# Altium PCB FEU31_Part1.PcbDoc
Units mm, origin at the board's own origin, x right, y up, seen from the top; angles counter-clockwise.
Board outline 22 x 22 mm, 2 copper layers (Top Layer, Bottom Layer), stack 1.021 mm thick; 41 components, 22 nets, 90 pads, 8 vias.
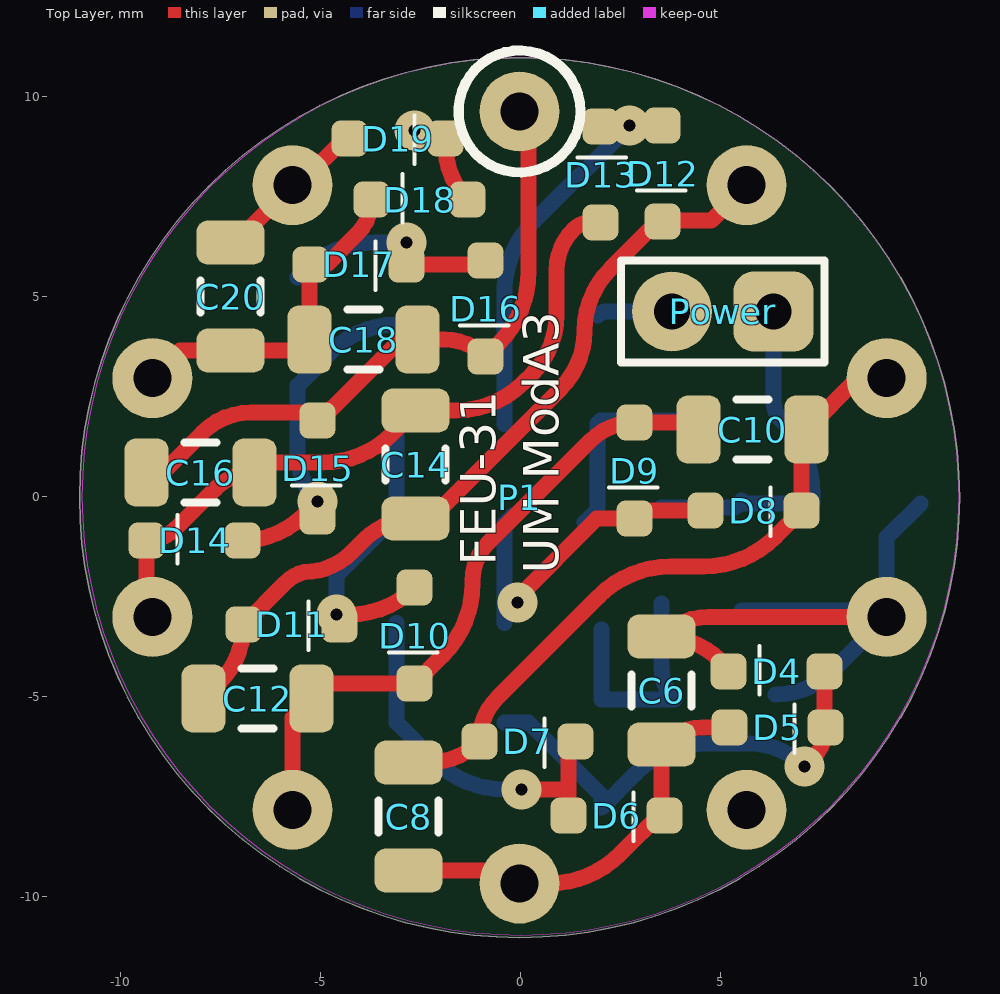
[diagram p0: Top Layer view]
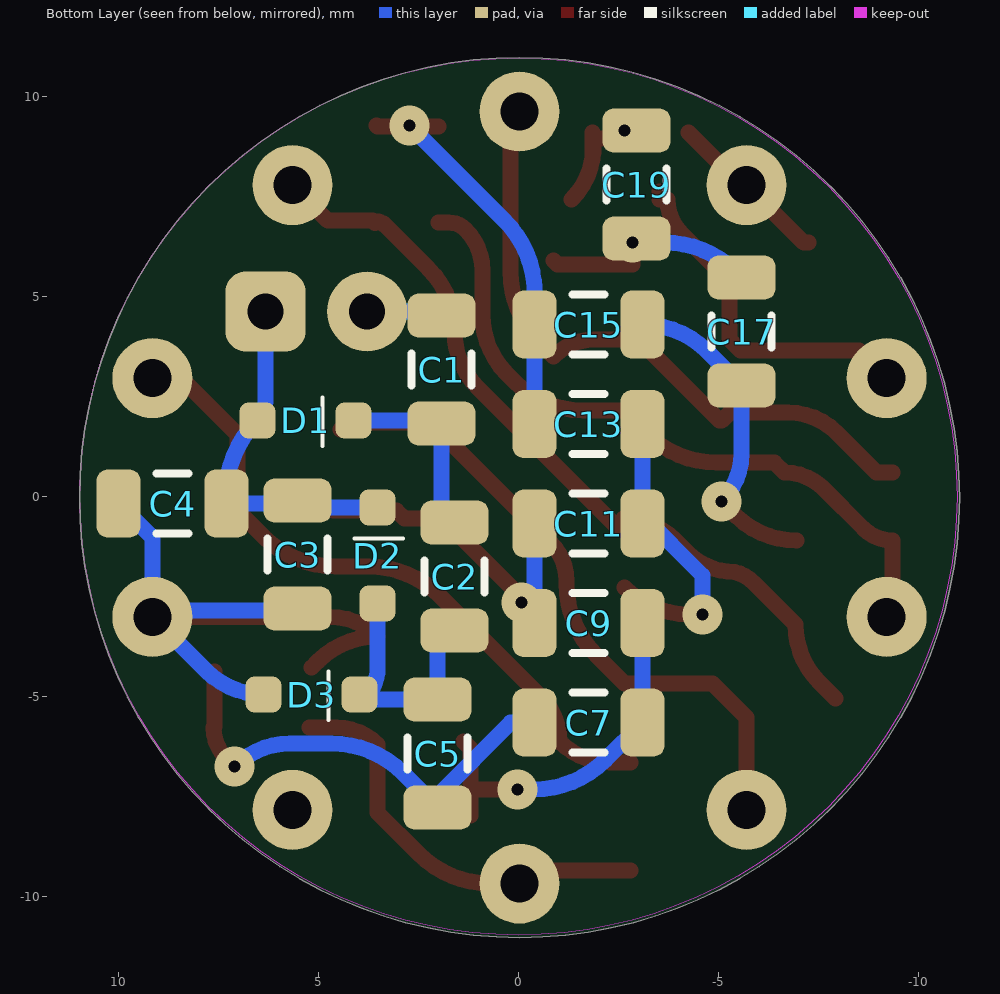
[diagram p1: Bottom Layer view, seen from below]
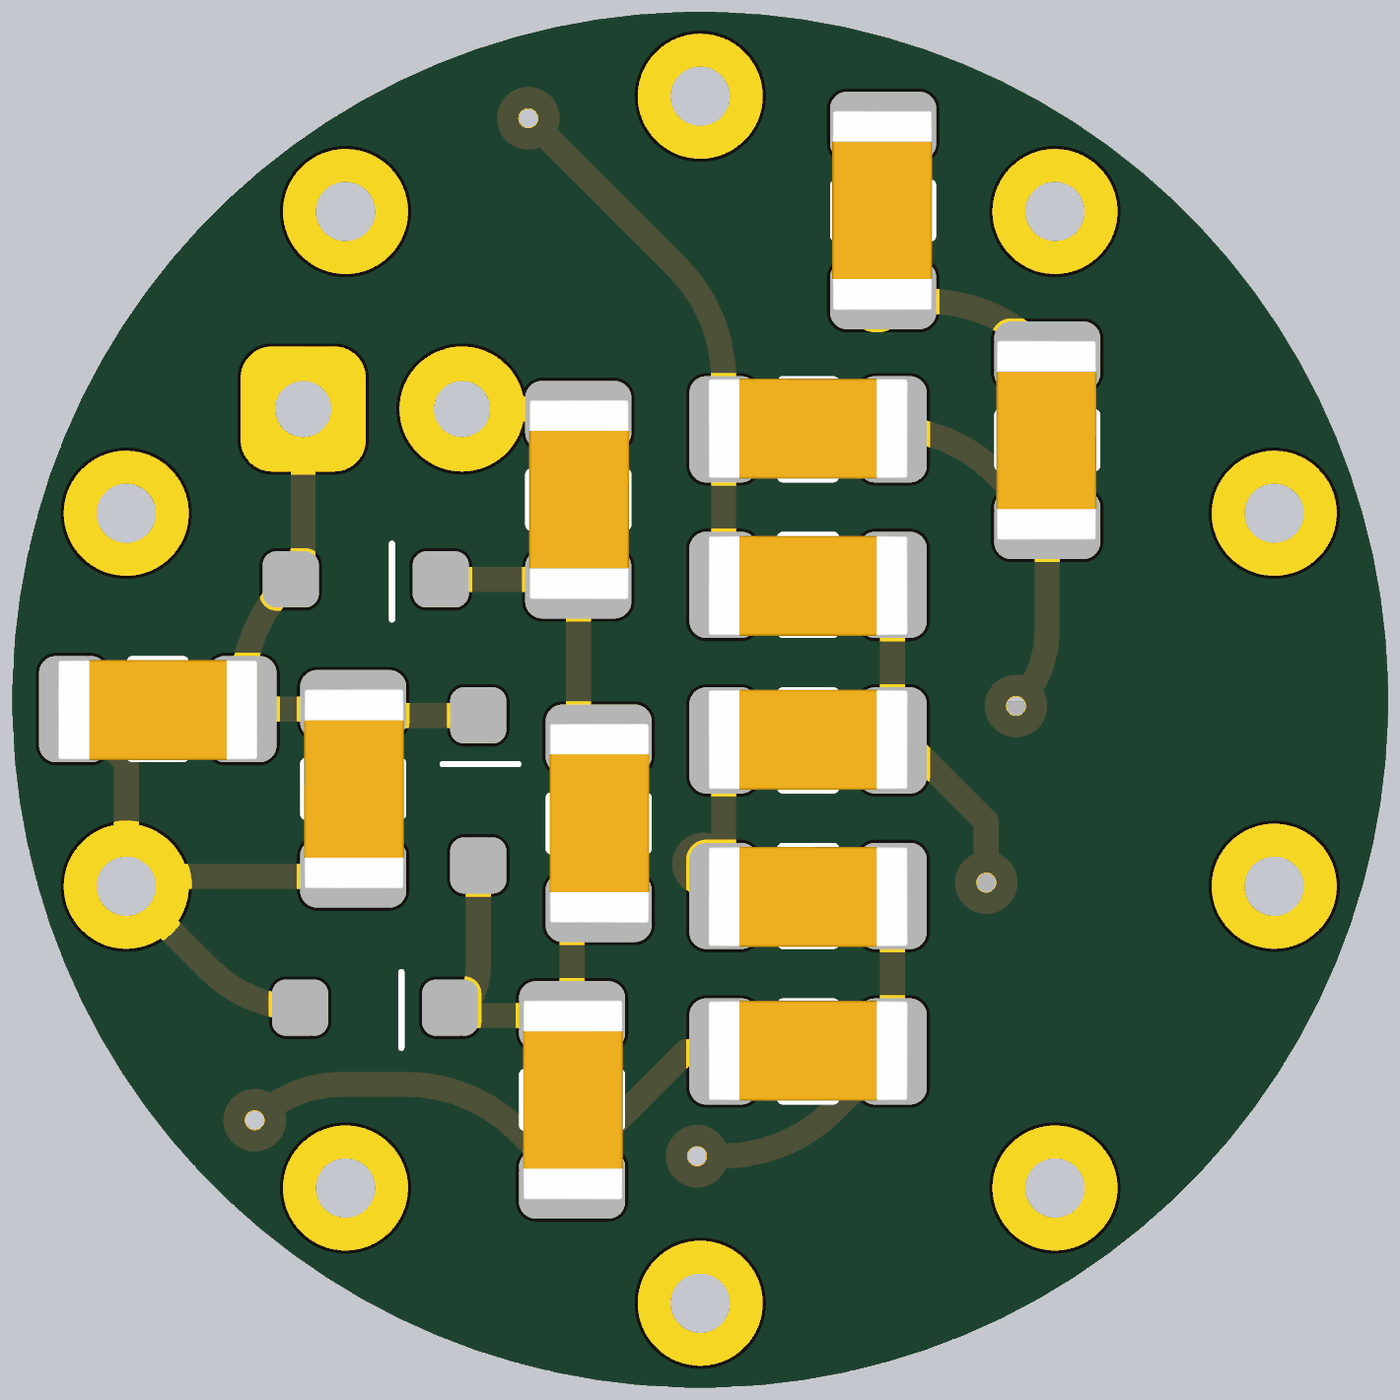
[diagram p2: 3D render of the assembled board from below, using the file's embedded part models]

## Layer stack, top to bottom
Top Solder: solder mask 0.0102, Solder Resist, Dk 3.5
Top Layer: signal copper 0.0356
Dielectric1: dielectric 0.95, FR-4, Dk 4.8
Bottom Layer: signal copper 0.0356
Bottom Solder: solder mask 0.0102, Solder Resist, Dk 3.5

## Board outline
-11.025,-0.025 ccw(c-0.025,-0.025) -0.025,-11.025 ccw(c-0.025,-0.025) 10.975,-0.025 ccw(c-0.025,-0.025) -0.025,10.975 ccw(c-0.025,-0.025)

## Design rules (kind name [scope] priority, off if disabled: settings)
Clearance [All] p1: gap=0.25
ComponentClearance [All] p1: gap=0.1 collisioncheckmode=3 verticalgap=0.254 showdistances=TRUE
HoleSize [All] p1: absolutevalues=TRUE maxlimit=2.54 minlimit=0.3 maxpercent=80.000 minpercent=20.000
HoleToHoleClearance [All] p1: gap=0.2 allowstackedmicrovias=TRUE
MinimumAnnularRing [All] p1: minimumring=0.35
MinimumSolderMaskSliver [All] p1: minsoldermaskwidth=0.152
PlaneClearance [All] p1: clearance=2
PlaneConnect [All] p1: planeconnectstyle=Relief reliefexpansion=0.457 reliefentries=4 reliefconductorwidth=0.3 reliefairgap=0.457
PolygonConnect PolygonConnect_via [IsVia] p1: connectstyle=Direct reliefconductorwidth=0.254 reliefentries=4 polygonreliefangle="90 Angle" airgapwidth=0.254
PolygonConnect [All] p2: connectstyle=Relief reliefconductorwidth=0.254 reliefentries=4 polygonreliefangle="90 Angle" airgapwidth=0.254
RoutingVias [All] p1: holewidth=0.3 width=0.62 viastyle="Through Hole" minholewidth=0.3 minwidth=0.62 maxholewidth=6 maxwidth=4
SilkToSilkClearance [All] p1: silktosilkclearance=0.152
SilkToSolderMaskClearance SilkscreenOverComponentPads [IsPad] p1: minsilkscreentomaskgap=0.1 clearancetoexposedcopper=TRUE
SolderMaskExpansion [All] p1: expansion=0.05
Width [All] p1: maxlimit=2.254 minlimit=0.4 preferedwidth=0.4
22 further rules are at their usual default settings.

## Components (designator, comment, footprint, x,y, rotation, side; value= is the part's Value field where it differs from the comment)
C1 "100nF" C1206 1.925,3.175 r90 bottom
C2 "100nF" C1206 1.6,-2 r90 bottom
C3 "100nF" C1206 5.525,-1.45 r90 bottom
C4 "100nF" C1206 8.65,-0.175 r180 bottom
C5 "100nF" C1206 2.025,-6.425 r90 bottom
C6 "100nF" C1206 3.525,-4.85 r90 top
C7 "100nF" C1206 -1.75,-5.65 r0 bottom
C8 "100nF" C1206 -2.8,-8 r270 top
C9 "100nF" C1206 -1.75,-3.162 r180 bottom
C10 "100nF" C1206 5.8,1.675 r0 top
C11 "100nF" C1206 -1.75,-0.675 r0 bottom
C12 "100nF" C1206 -6.575,-5.05 r0 top
C13 "100nF" C1206 -1.75,1.813 r180 bottom
C14 "100nF" C1206 -2.625,0.8 r270 top
C15 "100nF" C1206 -1.75,4.3 r0 bottom
C16 "100nF" C1206 -8,0.6 r0 top
C17 "100nF" C1206 -5.575,4.125 r270 bottom
C18 "100nF" C1206 -3.925,3.925 r0 top
C19 "100nF" C1206 -2.95,7.8 r270 bottom
C20 "100nF" C1206 -7.25,5 r270 top
D1 "" DA2JF8100L 6.525,1.9 r180 bottom
D2 "" DA2JF8100L 3.525,-2.675 r90 bottom
D3 "" DA2JF8100L 6.375,-4.95 r180 bottom
D4 "" DA2JF8100L 7.6,-4.375 r180 top
D5 "" DA2JF8100L 5.225,-5.775 r0 top
D6 "" DA2JF8100L 1.2,-7.975 r0 top
D7 "" DA2JF8100L -1.025,-6.125 r0 top
D8 "" DA2JF8100L 4.625,-0.35 r0 top
D9 "" DA2JF8100L 2.85,1.85 r270 top
D10 "" DA2JF8100L -2.65,-2.275 r270 top
D11 "" DA2JF8100L -6.925,-3.2 r0 top
D12 "" DA2JF8100L 3.55,9.275 r270 top
D13 "" DA2JF8100L 2,6.85 r90 top
D14 "" DA2JF8100L -6.95,-1.1 r180 top
D15 "" DA2JF8100L -5.075,1.9 r270 top
D16 "" DA2JF8100L -0.875,5.9 r270 top
D17 "" DA2JF8100L -5.25,5.8 r0 top
D18 "" DA2JF8100L -1.325,7.425 r180 top
D19 "" DA2JF8100L -4.275,8.95 r0 top
P1 "Header 5X2" ФЭУ-31 -0.025,-0.025 r90 top locked
Power "Header 2" HDR1X2 6.325,4.625 r180 top

## Footprints (in the part's own frame and the unit in brackets; to place one, negate y for a bottom-side part, rotate by r counter-clockwise, add the part's x,y. Pads: shape width x height; smd on the part's side, far side on the other; paste and mask are expansions set on the pad)
C1206 [mm] "Chip Capacitor, Body 3.2x1.6mm, IPC High Density"
  rrect50% 1.1x1.7 smd: 1(-1.35,0) 2(1.35,0)
  silkscreen extent -0.4,-0.75 0.4,0.75, body extent -1.6,-0.81 1.6,0.79, height 1.6
DA2JF8100L [mm]
  rrect50% 0.9x0.9 smd: 1(0,0) 2(2.4,0)
  silkscreen extent 1.62,-0.64 1.62,0.57, body extent 0.36,-0.65 2.06,0.6, height 0.7
HDR1X2 [mm] "Connector; Header; 2 Position"
  rrect50% 2x2 hole 0.9: 1(0,0)
  round 2 hole 0.9: 2(2.54,0)
  silkscreen extent -1.27,-1.27 3.81,1.27
ФЭУ-31 [mm]
  round 2 hole 0.95: 1(9.652,0) 2(7.809,-5.673) 3(2.983,-9.18) 4(-2.983,-9.18) 5(-7.809,-5.673) 6(-9.652,0) 7(-7.809,5.673) 8(-2.983,9.18) 9(2.983,9.18) 10(7.809,5.673)
  silkscreen extent 8.13,-1.52 11.18,1.52

## Part data
C1 C2 C3 C4 C5 C6 C7 C8 C9 C10 C11 C12 C13 C14 C15 C16 C17 C18 C19 C20: library part "Cap Semi", "Capacitor (Semiconductor SIM Model)"
D1 D2 D3 D4 D5 D6 D7 D8 D9 D10 D11 D12 D13 D14 D15 D16 D17 D18 D19: library part Diode, "Default Diode"
P1: "Header, 5-Pin, Dual row"
Power: "Header, 2-Pin"

## Via types
v1: diameter 1, hole 0.3, Top Layer to Bottom Layer, tented both sides, 8 vias

## Nets (pads, with @x,y where several pads share a name; then routed paths per layer and width w, separated by ;. In a path a pad name is that pad's centre, name@x,y a point inside that pad or via, vN(x,y) a via of type N, cw(c..) or ccw(c..) an arc to the next point about the centre after c; other vN are vias at no path point)
ANODE: P1.5
DINODE1: C18.1 C20.2 D17.1 D18.2 P1.9 | length 8.9
  Top Layer w0.4: P1.9 -8.512,3.65 C20.2 -5.55,3.65 C18.1 -5.275,5.775 D17.1 -4.85,5.8 -4.079,6.571 ; -4.078,6.572 ccw(c-4.932,7.425) D18.2 ; D18.2@-3.525,7.425 D18.2@-3.525,7.625
DINODE2: C16.1 C18.2 D15.1 D16.2 P1.1 | length 16.6
  Top Layer w0.4: C16.1 -8.95,0.6 -7.95,1.6 ; -7.949,1.601 cw(c-6.743,0.393) -6.743,2.1 -5.275,2.1 D15.1 -5.025,1.9 -3,3.925 C18.2 -1.901,3.925 cw(c-1.901,2.474) D16.2@-0.876,3.501 ; D16.2 -0.544,3.831 ccw(c-2.34,5.627) 0.2,5.627 0.2,9.084 ccw(c-0.568,9.084) P1.1@-0.025,9.627
DINODE3: C14.1 C16.2 D13.1 D14.2 P1.8 | length 17.6
  Top Layer w0.4: P1.8 -9.35,-2.862 D14.2 ccw(c-9.35,-0.074) -8.624,-0.799 -7.632,0.193 cw(c-6.65,-0.788) -7.543,0.275 cw(c-6.65,-0.788) C16.2 -6.4,0.85 -4.95,0.85 ccw(c-4.95,3.325) -3.2,1.575 C14.1 -1.625,2.15 ccw(c-1.625,4.564) 0.082,2.857 0.287,3.062 ccw(c-1.191,4.541) 0.9,4.541 0.9,5.649 cw(c2.351,5.649) 1.325,6.675 cw(c1.747,6.253) 1.747,6.85 D13.1
DINODE4: C12.1 C14.2 D11.1 D12.2 P1.2 | length 19.8
  Top Layer w0.4: C12.1 -7.526,-4.651 ccw(c-8.977,-3.2) D11.1 -5.893,-2.168 ; -5.893,-2.168 cw(c-5.125,-2.936) -5.397,-1.885 ccw(c-5.397,-0.224) -5.06,-1.85 ccw(c-5.397,-0.224) -4.223,-1.398 -3.905,-1.08 cw(c-2.625,-2.361) -3.452,-0.75 cw(c-2.625,-2.361) C14.2 ; C14.2@-2.438,-0.738 1.012,2.712 ; 1.013,2.713 ccw(c-0.406,4.131) 1.6,4.131 cw(c3.808,4.131) 2.247,5.692 3.344,6.79 cw(c3.55,6.584) D12.2 ; D12.2@3.587,6.837 3.65,6.9 4.765,6.9 P1.2
DINODE5: C10.1 C12.2 D9.1 D10.2 P1.7 | length 16.3
  Top Layer w0.4: P1.7 -5.698,-5.523 C12.2 -4.85,-4.675 D10.2 -1.944,-3.969 ccw(c-3.74,-2.173) -1.2,-2.173 -1.2,-2.1 cw(c0.128,-2.1) -0.811,-1.161 1.74,1.39 cw(c2.85,0.281) D9.1 4.275,1.85 C10.1
DINODE6: C8.1 C10.2 D7.1 D8.2 P1.3 | length 17.1
  Top Layer w0.4: C8.1 -2.292,-6.65 ccw(c-2.292,-4.858) D7.1 ; D7.1 cw(c0.544,-6.125) -0.566,-5.016 ; -0.565,-5.015 1.956,-2.494 cw(c3.752,-4.29) 3.752,-1.75 4.573,-1.75 ccw(c4.573,0.79) 6.369,-1.006 D8.2 7.025,1.55 C10.2 8.433,2.958 P1.3
DINODE7: C6.1 C8.2 D5.1 D6.2 P1.6 | length 10.6
  Top Layer w0.4: C8.2 -0.352,-9.35 P1.6 0.696,-9.677 ccw(c0.696,-7.137) 2.492,-8.933 3.525,-7.9 C6.1 ; C6.1 cw(c4.551,-7.226) 4.551,-5.775 D5.1
DINODE8: C3.1 C4.1 C6.2 D3.1 D4.2 P1.4 | length 18
  Top Layer w0.4: D4.2@5.018,-4.118 ccw(c3.525,-5.612) C6.2 cw(c4.714,-4.689) 4.714,-3.008 P1.4 ; D4.2@5.019,-4.119 D4.2@5.175,-4.275
  Bottom Layer w0.4: C3.1@5.525,-2.85 8.997,-2.85 P1.4 ; D3.1 ccw(c6.375,-2.929) 7.804,-4.358 P1.4 ; C4.1 9.155,-1.02 P1.4
FOTOKAT: C20.1 D19.1 P1.10 | length 4.1
  Top Layer w0.4: C20.1 -7.132,6.35 P1.10 -5.566,7.784 D19.1@-4.25,9.1
GND: C3.2 C4.2 D1.1 D2.2 Power.1 | length 8.9
  Bottom Layer w0.4: D2.2 5.35,-0.275 C3.2 5.6,-0.175 C4.2 7.3,0.073 ccw(c4.76,0.073) 6.556,1.869 D1.1 cw(c7.008,2.383) 6.325,2.383 Power.1
NetC1_1: C1.1 C2.2 D1.2 | length 4.8
  Bottom Layer w0.4: C2.2 1.925,-0.325 C1.1 2,1.9 D1.2
NetC2_1: C2.1 C5.2 D2.1 D3.2 | length 6.1
  Bottom Layer w0.4: C2.1@2.025,-3.325 C5.2 3.85,-5.075 cw(c4.635,-4.29) 3.55,-4.525 cw(c4.635,-4.29) 3.525,-4.29 D2.1
NetC5_1: C5.1 C7.2 D4.1 D5.2 | length 11.8
  Top Layer w0.4: v1(7.1,-6.75) 7.307,-6.543 ccw(c6.539,-5.775) D5.2 7.6,-5.75 D4.1
  Bottom Layer w0.4: C7.2 0.2,-5.65 2.025,-7.475 C5.1 2.881,-6.919 cw(c4.677,-8.715) 4.206,-6.219 cw(c4.677,-8.715) 4.677,-6.175 5.712,-6.175 cw(c5.712,-8.138) v1(7.1,-6.75)
NetC7_1: C7.1 C9.2 D6.1 D7.2 | length 9.3
  Top Layer w0.4: v1(0.025,-7.325) 1.175,-7.325 1.2,-7.3 ; D6.1 1.2,-7.3 ; D7.2 1.2,-6.3 1.2,-7.3
  Bottom Layer w0.4: C9.2 C7.1 -2.169,-6.581 ccw(c-0.373,-4.785) -0.373,-7.325 v1(0.025,-7.325)
NetC9_1: C9.1 C11.2 D8.1 D9.2 | length 8.5
  Top Layer w0.4: v1(-0.075,-2.65) -0.075,-2.525 1.9,-0.55 D9.2 3.05,-0.35 D8.1
  Bottom Layer w0.4: C9.1 C11.2 C11.2@-0.2,-0.475
NetC11_1: C11.1 C13.2 D10.1 D11.2 | length 7.5
  Top Layer w0.4: v1(-4.6,-2.95) -4.28,-2.95 ccw(c-4.28,-0.645) D10.1@-2.651,-2.276 ; D10.1@-2.651,-2.276 ccw(c-4.28,-0.645) D10.1 D10.1@-2.651,-2.276
  Bottom Layer w0.4: v1(-4.6,-2.95) -4.6,-1.975 -3.1,-0.475 C13.2
NetC13_1: C13.1 C15.2 D12.1 D13.2 | length 10.2
  Top Layer w0.4: D13.2 3.525,9.25 D12.1
  Bottom Layer w0.4: C13.1 C15.2 -0.4,5.098 cw(c2.14,5.098) -0.383,5.392 cw(c2.14,5.098) 0.344,6.894 v1(2.725,9.275)
NetC15_1: C15.1 C17.2 D14.1 D15.2 | length 8.2
  Top Layer w0.4: D14.1 ccw(c-6.95,1.073) -6.059,-0.909 ccw(c-6.95,1.073) -5.451,-0.5 ccw(c-6.95,1.073) -5.414,-0.464 v1(-5.075,-0.125)
  Bottom Layer w0.4: v1@-5.076,-0.124 cw(c-3.868,1.082) -5.575,1.082 C17.2 -4.722,3.628 cw(c-3.1,2.007) C15.1
NetC17_1: C17.1 C19.2 D16.1 D17.2 | length 5.5
  Top Layer w0.4: v1(-2.85,6.35) D17.2 -0.975,5.8 D16.1
  Bottom Layer w0.4: C17.1 -5.444,5.606 cw(c-3.648,3.81) -4.119,6.306 cw(c-3.648,3.81) -3.648,6.35 v1(-2.85,6.35)
NetC19_1: C19.1 D18.1 D19.2 | length 3.2
  Top Layer w0.4: v1(-2.65,9.15) -2.45,8.95 D19.2 -1.875,8.753 ccw(c0.003,8.753) -1.85,8.447 ; D19.2@-1.85,9.1 -1.85,8.447 ; D18.1 cw(c0.003,8.753) -1.85,8.447
PUMP: C1.2 Power.2 | length 1.9
  Bottom Layer w0.4: C1.2 cw(c2.166,4.284) 2.166,4.625 Power.2

## Keep-outs
Keep-Out Layer:
  circle w0.01: c0,0 r10.964

## Silkscreen, mask and mechanical layers (free items; w line width, h text height)
Top Overlay:
  text "FEU-31" at -0.325,-1.725 h1.52 r90
  text "UM ModA3" at 1.25,-1.925 h1.52 r90